# Altium PCB TIDA-010954-RevB.PcbDoc (part 2 of 8)
Units mm, origin at the board's own origin, x right, y up, seen from the top; angles counter-clockwise.
Board outline 290 x 100 mm, 6 copper layers (Top Layer, Mid1, Mid2, Mid3, Mid4, Bottom Layer), stack 1.59 mm thick; 394 components, 204 nets, 1137 pads, 2188 vias.
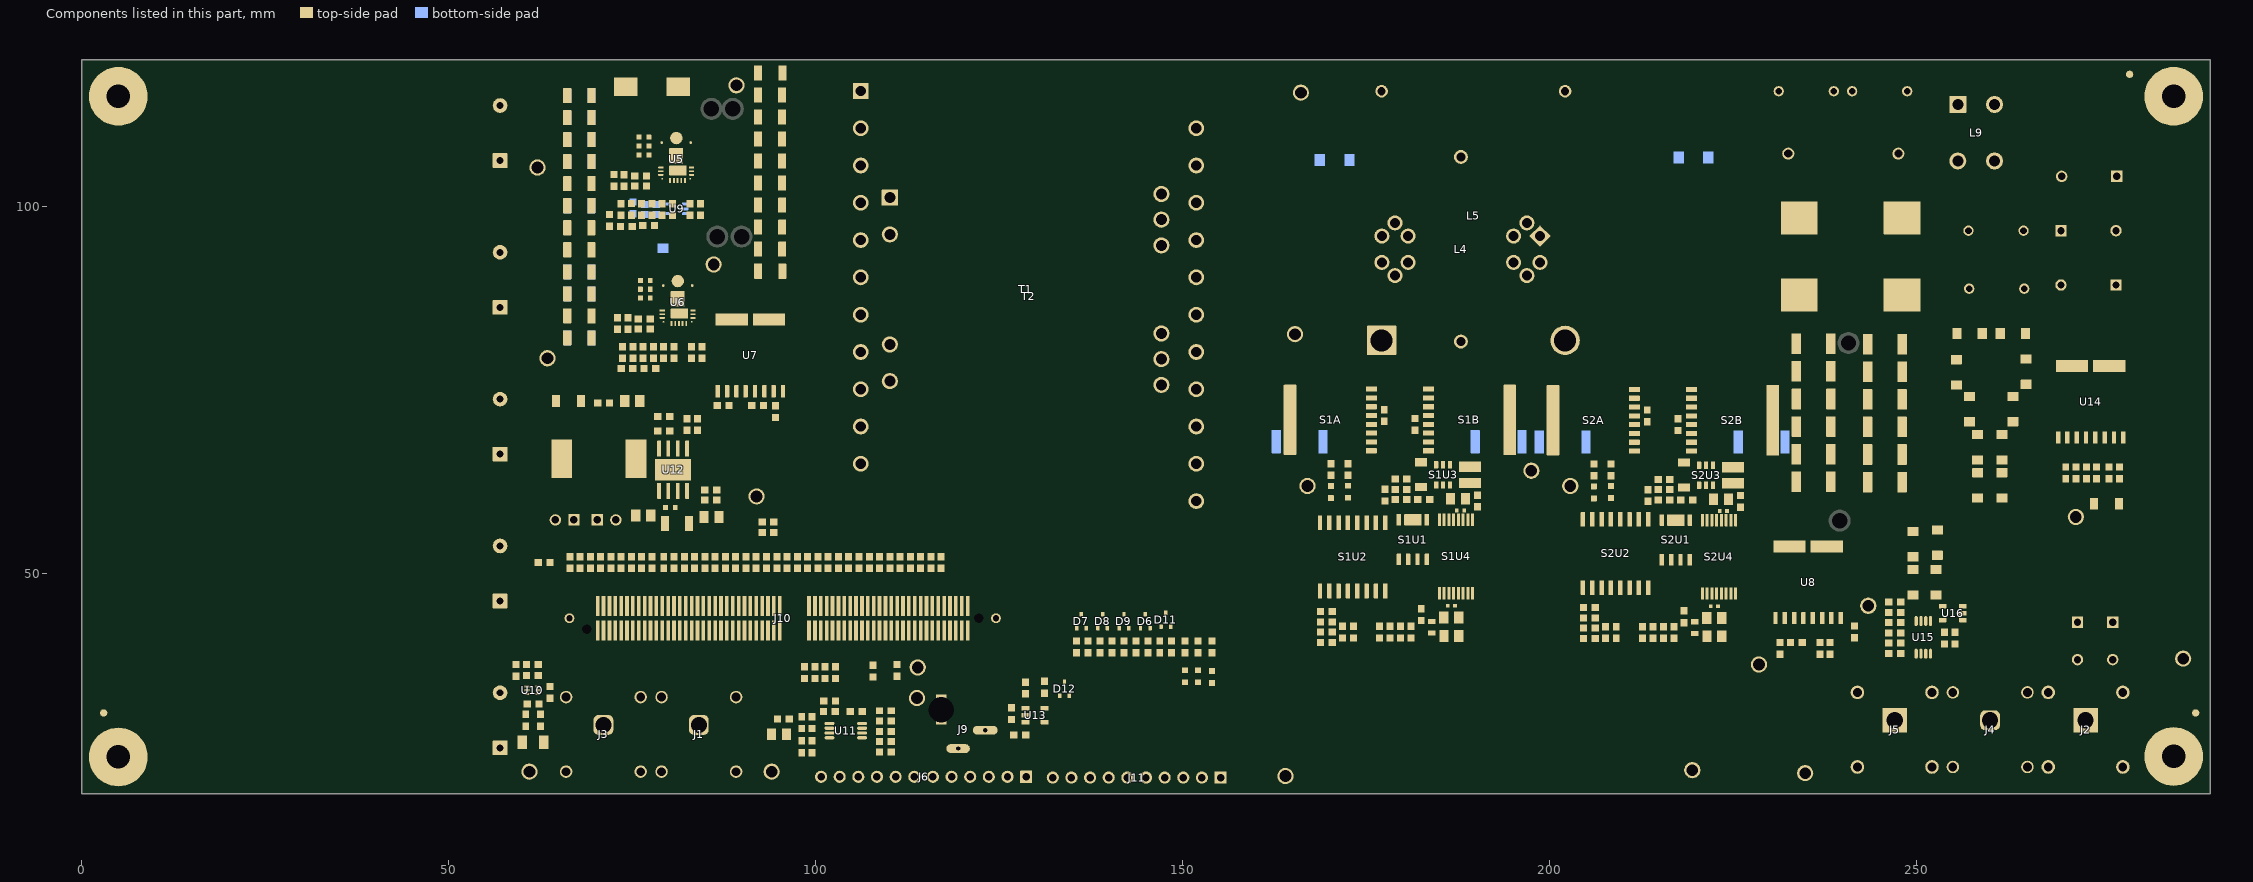
[diagram p6: the components of this part, seen from the top]

## Components (designator, comment, footprint, x,y, rotation, side; value= is the part's Value field where it differs from the comment) (continued)
ZZ2 "These assemblies are ESD sensitive, ESD precautions shall be observed." AssemblyNote 2.949,151.009 r0 top
ZZ3 "These assemblies must be clean and free from flux and all contaminants. Use of no clean flux is not acceptable." AssemblyNote 2.949,148.76 r0 top
ZZ4 "These assemblies must comply with workmanship standards IPC-A-610 Class 2, unless otherwise specified." AssemblyNote 2.949,146.511 r0 top

## Footprints (in the part's own frame and the unit in brackets; to place one, negate y for a bottom-side part, rotate by r counter-clockwise, add the part's x,y. Pads: shape width x height; smd on the part's side, far side on the other; paste and mask are expansions set on the pad)
0603 [mm] "0603 from SM-752 data"
  rect 1x0.95 smd: 1(-0.8,0) 2(0.8,0)
  silkscreen extent -1.52,-0.69 1.52,0.69, body extent -0.87,-0.47 0.87,0.47, height 1
0805_HV [mil] "0805 with 30mil clearance between pads"
  rect 50x63 smd: 1(-40,0) 2(40,0)
  silkscreen extent -74,-40 74,40, body extent -43,-29 43,29, height 57
1206 [mm] "1206 from SM-752 data"
  rect 1.3x1.85 smd: 1(-1.45,0) 2(1.45,0)
  silkscreen extent -2.4,-1.21 2.4,1.21, body extent -1.7,-0.9 1.7,0.9, height 1.35
1206_180 [mm] "1206_180"
  rect 1.1x1.6 smd: 1(-1.7,0) 2(1.7,0)
  silkscreen extent -0.9,-1 0.9,1, body extent -1.75,-0.95 1.75,0.95, height 1.8
APT1608_Green [mm] "SMD, 2-Leads, Body 0.8x1.6mm"
  rect 0.8x0.8 smd: 1(-0.825,0) 2(0.825,0)
  silkscreen extent -1,-0.7 1.8,0.7, body extent -0.8,-0.4 0.81,0.4, height 0.76
APT1608_Yellow [mm] "SMD, 2-Leads, Body 0.8x1.6mm"
  rect 0.8x0.8 smd: 1(-0.825,0) 2(0.825,0)
  silkscreen extent -1,-0.7 1.8,0.7, body extent -0.8,-0.4 0.81,0.4, height 0.76
AssemblyNote [mm] "Assembly Note"
AssemblyNoteLabel [mm] "Assembly Note for PCB Labels"
CE_Mark_5mm [mm] "Minimum text height for CE Mark"
  silkscreen extent -3.5,-2.5 3.5,2.5
Cliff_FCR7350B [mm] "Panel Socket, R/A, TH"
  rrect50% 2.7x2.7 hole 2.2: 1(0,0)
  round 1.7 hole 1.2: 2(-5.08,3.8) 3(5.08,3.8) 4(5.08,-6.36) 5(-5.08,-6.36)
  silkscreen extent -6.01,-13.5 6.01,5.5, body extent -6,-27.5 6,5.5, height 12.3
Cliff_FCR7350R [mm] "Panel Socket, R/A, TH"
  rrect50% 2.7x2.7 hole 2.2: 1(0,0)
  round 1.7 hole 1.2: 2(-5.08,3.8) 3(5.08,3.8) 4(5.08,-6.36) 5(-5.08,-6.36)
  silkscreen extent -6.01,-13.5 6.01,5.5, body extent -6,-27.5 6,5.5, height 12.3
controlCARD-120HSEC [mm] "Pads are not numbered according to Samtec datasheet."
  rect 0.5x2.724 smd: 1(-23.357,-1.678) 2(-23.357,1.722) 3(-22.557,-1.678) 4(-22.557,1.722) 5(-21.757,-1.678) 6(-21.757,1.722) 7(-20.957,-1.678) 8(-20.957,1.722) 9(-20.157,-1.678) 10(-20.157,1.722) 11(-19.357,-1.678) 12(-19.357,1.722) 13(-18.557,-1.678) 14(-18.557,1.722) 15(-17.757,-1.678) 16(-17.757,1.722) 17(-16.957,-1.678) 18(-16.957,1.722) 19(-16.157,-1.678) 20(-16.157,1.722) 21(-15.357,-1.678) 22(-15.357,1.722) 23(-14.557,-1.678) 24(-14.557,1.722) 25(-13.757,-1.678) 26(-13.757,1.722) 27(-12.957,-1.678) 28(-12.957,1.722) 29(-12.157,-1.678) 30(-12.157,1.722) 31(-11.357,-1.678) 32(-11.357,1.722) 33(-10.557,-1.678) 34(-10.557,1.722) 35(-9.757,-1.678) 36(-9.757,1.722) 37(-8.957,-1.678) 38(-8.957,1.722) 39(-8.157,-1.678) 40(-8.157,1.722) 41(-7.357,-1.678) 42(-7.357,1.722) 43(-6.557,-1.678) 44(-6.557,1.722) 45(-5.757,-1.678) 46(-5.757,1.722) 47(-4.957,-1.678) 48(-4.957,1.722) 49(-4.157,-1.678) 50(-4.157,1.722) 51(-3.357,-1.678) 52(-3.357,1.722) 53(-2.557,-1.678) 54(-2.557,1.722) 55(-1.757,-1.678) 56(-1.757,1.722) 57(2.243,-1.678) 58(2.243,1.722) 59(3.043,-1.678) 60(3.043,1.722) 61(3.843,-1.678) 62(3.843,1.722) 63(4.643,-1.678) 64(4.643,1.722) 65(5.443,-1.678) 66(5.443,1.722) 67(6.243,-1.678) 68(6.243,1.722) 69(7.043,-1.678) 70(7.043,1.722) 71(7.843,-1.678) 72(7.843,1.722) 73(8.643,-1.678) 74(8.643,1.722) 75(9.443,-1.678) 76(9.443,1.722) 77(10.243,-1.678) 78(10.243,1.722) 79(11.043,-1.678) 80(11.043,1.722) 81(11.843,-1.678) 82(11.843,1.722) 83(12.643,-1.678) 84(12.643,1.722) 85(13.443,-1.678) 86(13.443,1.722) 87(14.243,-1.678) 88(14.243,1.722) 89(15.043,-1.678) 90(15.043,1.722) 91(15.843,-1.678) 92(15.843,1.722) 93(16.643,-1.678) 94(16.643,1.722) 95(17.443,-1.678) 96(17.443,1.722) 97(18.243,-1.678) 98(18.243,1.722) 99(19.043,-1.678) 100(19.043,1.722) 101(19.843,-1.678) 102(19.843,1.722) 103(20.643,-1.678) 104(20.643,1.722) 105(21.443,-1.678) 106(21.443,1.722) 107(22.243,-1.678) 108(22.243,1.722) 109(23.043,-1.678) 110(23.043,1.722) 111(23.843,-1.678) 112(23.843,1.722) 113(24.643,-1.678) 114(24.643,1.722) 115(25.443,-1.678) 116(25.443,1.722) 117(26.243,-1.678) 118(26.243,1.722) 119(27.043,-1.678) 120(27.043,1.722)
  round 0.025 hole 1.27 unplated mask+0.876: 181(-24.857,0.022) 182(28.543,1.522)
  round 1.348 hole 0.84: 185(-27.207,0.022) 186(30.893,0.022)
  silkscreen extent -32.11,-3.86 35.8,3.9, body extent -31.75,-3.48 35.3,3.52, height 12.35
DBV0005A-MFG [mm]
  rrect17% 1.1x0.6 smd paste+0 mask+0: 1(-1.3,0.95) 2(-1.3,0) 3(-1.3,-0.95) 4(1.3,-0.95) 5(1.3,0.95)
  silkscreen extent -2.22,-1.53 0.87,1.72, body extent -1.95,-1.78 1.95,1.78, height 0.25
DBV0005A_N [mm] "SOT23, 5-Leads, Body 2.9x1.6mm, Pitch 0.95mm, Lead Span 2.8mm, IPC Medium Density"
  rrect17% 1x0.6 smd: 1(-1.375,0.95) 2(-1.375,0) 3(-1.375,-0.95) 4(1.375,-0.95) 5(1.375,0.95)
  silkscreen extent -1.62,-1.55 0.38,1.55, body extent -1.42,-1.46 1.42,1.46, height 1.09
DBV0006A_N [mm] "SOT23, 6-Leads, Body 2.9x1.6mm, Pitch 0.95mm, Lead Span 2.8mm, IPC Medium Density"
  rrect17% 1x0.6 smd: 1(-1.375,0.95) 2(-1.375,0) 3(-1.375,-0.95) 4(1.375,-0.95) 5(1.375,0) 6(1.375,0.95)
  silkscreen extent -1.68,-1.55 0.5,1.55, body extent -1.42,-1.46 1.42,1.46, height 1.12
DCK0005A_N [mm] "SOT353, 5-Leads, Body 2x1.3mm, Pitch 0.65mm, Lead Span 2.1mm, IPC Medium Density"
  rrect25% 0.85x0.4 smd: 1(-1.125,0.65) 2(-1.125,0) 3(-1.125,-0.65) 4(1.125,-0.65) 5(1.125,0.65)
  silkscreen extent -1.48,-1.02 0.55,1.1, body extent -1.14,-1 1.14,1, height 0.95
DDA0008E-MFG [mm]
  rrect20% 2.2x0.5 smd paste-1000 mask+0: 1(-2.875,1.905) 2(-2.875,0.635) 3(-2.875,-0.635) 4(-2.875,-1.905) 5(2.875,-1.905) 6(2.875,-0.635) 7(2.875,0.635) 8(2.875,1.905)
  rrect3% 2.95x4.9 smd paste-1000 mask-1000: 9(0,0)
  silkscreen extent -4.67,-2.83 2,2.83, body extent -4.08,-2.68 4.08,2.68, height 0.25
DFQ0007A-MFG [mm]
  rrect17% 1.55x0.6 smd paste+0 mask+0: 1(-2.7,1.905) 2(-2.7,0.635) 3(-2.7,-0.635) 4(-2.7,-1.905) 5(2.7,-1.905) 7(2.7,1.905)
  rrect6% 1.55x2.36 smd paste+0 mask+0: 6(2.7,0)
  silkscreen extent -4.14,-2.5 1.55,2.5, body extent -3.57,-2.75 3.57,2.75, height 0.25
DGK0008A_N [mm] "TSOP, 8-Leads, Body 3x3mm, Pitch 0.65mm, IPC Medium Density"
  oval 1.35x0.45 smd: 1(-2.225,0.975) 2(-2.225,0.325) 3(-2.225,-0.325) 4(-2.225,-0.975) 5(2.225,-0.975) 6(2.225,-0.325) 7(2.225,0.325) 8(2.225,0.975)
  silkscreen extent -2.75,-1.55 0.95,1.55, body extent -2.45,-1.5 2.45,1.5, height 0.96
DRL0006A [mm] "SOTFL, 6-Flat Leads, Body 1.2x1.6x0.6mm, Pitch 0.5mm, TI recommended"
  rrect33% 0.67x0.3 smd: 1(-0.74,0.5) 2(-0.74,0) 3(-0.74,-0.5) 4(0.74,-0.5) 5(0.74,0) 6(0.74,0.5)
  silkscreen extent -0.9,-0.95 0.5,0.95, body extent -0.8,-0.8 0.8,0.8, height 0.61
DVG0010A-MFG [mm]
  rrect6% 1.65x4.41 smd paste+0 mask+0: 1(-4.875,2.54) 2(-4.875,-2.54)
  rrect17% 1.65x0.6 smd paste+0 mask+0: 3(4.875,-4.445) 4(4.875,-3.175) 5(4.875,-1.905) 6(4.875,-0.635) 7(4.875,0.635) 8(4.875,1.905) 9(4.875,3.175) 10(4.875,4.445)
  silkscreen extent -6.37,-5.25 3.67,5.25, body extent -5.8,-5.5 5.8,5.5, height 0.25
DW0016A-MFG [mm]
  rrect17% 2x0.6 smd paste+0 mask+0: 1(-4.65,4.445) 2(-4.65,3.175) 3(-4.65,1.905) 4(-4.65,0.635) 5(-4.65,-0.635) 6(-4.65,-1.905) 7(-4.65,-3.175) 8(-4.65,-4.445) 9(4.65,-4.445) 10(4.65,-3.175) 11(4.65,-1.905) 12(4.65,-0.635) 13(4.65,0.635) 14(4.65,1.905) 15(4.65,3.175) 16(4.65,4.445)
  silkscreen extent -5.46,-5.25 3.15,5.38, body extent -5.75,-5.35 5.75,5.35, height 0.25
DWX0016A-MFG [mm]
  rrect24% 1.7x0.41 smd paste+0 mask+0: 1(-5,2.275) 2(-5,1.625) 3(-5,0.975) 4(-5,0.325) 5(-5,-0.325) 6(-5,-0.975) 7(-5,-1.625) 8(-5,-2.275) 9(5,-2.275) 10(5,-1.625) 11(5,-0.975) 12(5,-0.325) 13(5,0.325) 14(5,0.975) 15(5,1.625) 16(5,2.275)
  silkscreen extent -6.52,-2.98 3.8,2.98, body extent -5.95,-3.22 5.95,3.22, height 0.25
E_900x700x900 [mm] "TH, 2- Leads, Body 9x7mm, Pin Spacing 7.5mm"
  round 1.4 hole 0.9: 1(-3.75,0) 2(3.75,0)
  silkscreen extent -4.5,-3.5 4.5,3.5, body extent -4.49,-3.5 4.49,3.5, height 11.96
FCC_disclaimer [mm]
Fiducial10-20 [mm]
  round 1 smd mask+0.5: 1(0,0)
  Top Layer keep-out circle w1.178: c0,0 r0.5
FP-63ZLJ2700M18X40_RADIAL-MFG [mm]
  rrect7% 2x2 hole 0.95 paste-2539.97 mask+0: 1(-3.75,0)
  round 2 hole 0.95 paste-2539.97 mask+0: 2(3.75,0)
  body extent -9,0 8.98,46, height 18
FP-750371975r00_PTH_XFRMR_62MM7_62MM8-MFG [mm]
  rrect5% 2.15x2.15 hole 1.4: 1(-22.86,27.94)
  round 2.15 hole 1.4: 2(-22.86,22.86) 3(-22.86,17.78) 4(-22.86,12.7) 5(-22.86,7.62) 6(-22.86,2.54) 7(-22.86,-2.54) 8(-22.86,-7.62) 9(-22.86,-12.7) 10(-22.86,-17.78) 11(-22.86,-22.86) 12(22.86,-27.94) 13(22.86,-22.86) 14(22.86,-17.78) 15(22.86,-12.7) 16(22.86,-7.62) 17(22.86,-2.54) 18(22.86,2.54) 19(22.86,7.62) 20(22.86,12.7) 21(22.86,17.78) 22(22.86,22.86)
  silkscreen extent -32.07,-31.4 31.35,31.4, body extent -31.45,-31.5 31.45,31.5, height 0.25
FP-750371976r00_XFRMR_22MM0_22MM0-MFG [mm]
  rrect5% 2.05x2.05 hole 1.35 paste-2539.97 mask+0: 1(-8.89,6.35)
  round 2.05 hole 1.35 paste-2539.97 mask+0: 2(-8.89,3.81) 3(-6.35,3.81) 4(3.81,-6.35) 5(3.81,-8.89) 6(6.35,-8.89) 7(8.89,-6.35) 8(8.89,-3.81) 9(6.35,-3.81) 10(-3.81,6.35) 11(-3.81,8.89) 12(-6.35,8.89)
  round 1.9 hole 1.25 paste-2539.97 mask+0: 13(8.89,8.89) 14(-8.89,-8.89)
  silkscreen extent -11.72,-11 11,11, body extent -11.1,-11.1 11.1,11.1, height 0.25
FP-7443551221_SMD_IND_12MM8_12MM8-MFG [mm]
  rrect2% 5x4.5 smd paste+0 mask+0: 1(0,5.25) 2(0,-5.25)
  silkscreen extent -6.65,-6.65 6.65,6.65, body extent -6.75,-7.6 6.75,7.6, height 0.25
FP-7448025003_PTH_COMMON_CHOKE-MFG [mm]
  rrect4% 2.3x2.3 hole 1.5 paste-2539.97 mask+0: 1(-3.85,-2.5)
  round 2.3 hole 1.5 paste-2539.97 mask+0: 2(3.85,-2.5) 3(3.85,2.5) 4(-3.85,2.5)
  silkscreen extent -9,-7 9,7, body extent -9.1,-7.1 9.1,7.1, height 0.25
FP-36916300000_RADIAL-MFG [mm]
  rrect6% 1.55x1.55 hole 1 paste-2539.97 mask+0: 1(-2.54,0)
  round 1.55 hole 1 paste-2539.97 mask+0: 2(2.54,0)
  silkscreen extent -4.25,-2 4.25,2, body extent -4.35,-2.1 4.35,2.1, height 0.25
FP-694106402002_CONN_PWR_10MM7_9MM0-MFG [mm]
  rrect7% 1.4x4.1 hole 3.5 slot 0.8 at 0 deg paste-2539.97 mask+0: 1(-3.5,1.15)
  rrect100% 3.2x1.2 hole 0.6 slot 2.6 at 0 deg paste-2539.97 mask+0: 2(-1.2,-4.15)
  rrect100% 3.4x1.2 hole 0.6 slot 2.8 at 0 deg paste-2539.97 mask+0: 3(2.5,-1.65)
  silkscreen extent -4.75,-5.5 4.75,5.5, body extent -4.85,-5.6 4.85,5.6, height 0.25
FP-APG1608SURKC_T_0603-MFG [mm]
  rrect13% 0.8x0.8 smd paste-1000 mask+0: 1(-0.825,0) 2(0.825,0)
  silkscreen extent -1.92,-0.8 0.85,0.8, body extent -1.33,-0.55 1.33,0.55, height 0.25
FP-B181125V0_PTH_IND_41MM45_35MM1-MFG [mm]
  rrect4% 4x4 hole 3 paste-2539.97 mask+0: 1(-16.975,12.5)
  round 4 hole 3 paste-2539.97 mask+0: 2(-16.975,-12.5)
  round 1.7 hole 1.1 paste-2539.97 mask+0: 3(16.975,12.5) 4(16.975,-12.5)
  silkscreen extent -21.45,-17.55 20.73,17.55, body extent -20.83,-17.65 20.83,17.65, height 0.25
FP-B181134V1_PTH_XFRMR_48MM0_50MM0-MFG [mm]
  rrect5% 2.2x2.2 hole 1.5 paste-2539.97 mask+0: 1(-12.5,-18.5)
  round 2.2 hole 1.5 paste-2539.97 mask+0: 2(-7.5,-18.5) 3(7.5,-18.5) 4(12.5,-18.5) 5(13,18.5) 6(9.5,18.5) 7(6,18.5) 8(-6,18.5) 9(-9.5,18.5) 10(-13,18.5)
  silkscreen extent -25,-24.62 25.4,25.1, body extent -26,-25 26,25, height 0.25
FP-C4532X7T2E105K250KA_1812-MFG [mm]
  rrect8% 1.3x2.8 smd paste+0 mask+0: 1(-2.35,0) 2(2.35,0)
  silkscreen extent -2.45,-1.8 2.45,1.8, body extent -3.1,-1.9 3.1,1.9, height 0.25
FP-ERJP08D4993V_1206-MFG [mm]
  rrect8% 1.25x1.5 smd paste+0 mask+0: 1(-1.725,0) 2(1.725,0)
  silkscreen extent -0.72,-0.82 0.72,0.82, body extent -2.45,-0.92 2.45,0.92, height 0.25
FP-FCR7350G_CONN_BANANA_JACK-MFG [mm]
  rrect3% 3.35x3.35 hole 2.2 paste-2539.97 mask+0: 1(11,0)
  round 1.85 hole 1.2 paste-2539.97 mask+0: 2(4.64,5.08) 3(14.8,5.08) 4(4.64,-5.08) 5(14.8,-5.08)
  silkscreen extent -1.83,-6.05 17.2,6.05, body extent -16.7,-6.15 16.7,6.15, height 0.25
FP-FCR7350L_CONN_BANANA_JACK-MFG [mm]
  rrect3% 3.35x3.35 hole 2.2 paste-2539.97 mask+0: 1(11,0)
  round 1.85 hole 1.2 paste-2539.97 mask+0: 2(4.64,5.08) 3(14.8,5.08) 4(4.64,-5.08) 5(14.8,-5.08)
  silkscreen extent -1.83,-6.05 17.2,6.05, body extent -16.7,-6.15 16.7,6.15, height 0.25
FP-GRM32EC72A106KE05L_1210-MFG [mm]
  rrect9% 1.1x2.05 smd paste+0 mask+0: 1(-1.65,0) 2(1.65,0)
  silkscreen extent -0.72,-1.35 0.72,1.35, body extent -2.3,-1.45 2.3,1.45, height 0.25
FP-GRM188R72A104KA35J_0603-MFG [mm]
  rrect15% 0.65x0.7 smd paste+0 mask+0: 1(-0.675,0) 2(0.675,0)
  body extent -1.1,-0.55 1.1,0.55, height 0.25
FP-IsoM3-275-B-L2_RADIAL-MFG [mm]
  rrect6% 1.55x1.55 hole 1 paste-2539.97 mask+0: 1(-3.75,0)
  round 1.55 hole 1 paste-2539.97 mask+0: 2(3.75,0)
  silkscreen extent -6.6,-3.45 6.6,3.45, body extent -6.7,-3.55 6.7,3.55, height 0.25
FP-THJP2512AST1_2512-MFG [mil]
  rrect8% 49x125 smd paste+0 mask+0: 1(-125.5,0) 2(125.5,0)
  silkscreen extent -86,-66 86,66, body extent -126,-63 126,63, height 35
IEC_HighVoltage_Small [mm]
  silkscreen extent -2.72,-2.24 2.72,2.47
IEC_HotSurface_Small [mm]
  silkscreen extent -2.72,-2.36 2.72,2.35
Keystone5010 [mil] "Keystone Multipurpose loops"
  round 87 hole 63: 1(0,0)
  silkscreen extent -70,-70 70,70, body extent -63,-63 63,62, height 319
Keystone5011 [mil] "Keystone Multipurpose loops"
  round 87 hole 63: 1(0,0)
  silkscreen extent -70,-70 70,70, body extent -63,-63 63,62, height 319
Keystone5127 [mil] "Keystone Multipurpose loops"
  round 87 hole 63: 1(0,0)
  silkscreen extent -70,-70 70,70, body extent -63,-63 63,62, height 319
Keystone_1902C [mil] "Hex Standoff, 4-40 threaded, nylon"
  round 1 on Mech4: 0(0,0)
  body extent -145,-126 146,126, height 501
KLA0009A-MFG [mm]
  rrect14% 1.5x0.7 smd paste+0 mask-1000: 1(-5.539,4.2) 2(-5.539,3) 3(-5.539,1.8) 4(-5.539,0.6) 5(-5.539,-0.6) 6(-5.539,-1.8) 7(-5.539,-3) 8(-5.539,-4.2)
  rrect15% 1.75x9.6 smd paste-1000 mask-1000: 9(5.539,0)
  Top Layer region: -6.36,4.6 -6.351,4.635 -6.325,4.661 -6.29,4.67 -6.29,4.67 1.587,4.67 1.622,4.661 1.648,4.635 1.657,4.6 1.657,4.6 1.657,-4.6 1.648,-4.635 1.622,-4.661 1.587,-4.67 1.587,-4.67 -3.388,-4.67 -3.423,-4.661 -3.449,-4.635 -3.458,-4.6 -3.458,-4.6 -3.458,0.13 -3.462,0.149 -3.473,0.165 -3.489,0.176 -3.508,0.18 -3.508,0.18 -6.29,0.18 -6.317,0.185 -6.339,0.201 -6.355,0.223 -6.36,0.25 -6.36,0.25
  silkscreen extent -6.96,-5.18 5.24,5.18, body extent -6.46,-5.1 6.56,5.1, height 0.25
Label_650x200 [mil] "Thermal Transfer Label"
  round 1 on Mech13: 0(0,0)
  silkscreen extent -325,-100 325,100, body extent -325,-100 325,100, height 1
Molex_0022284023 [mm] "Header, 2.54mm, 2x1, TH"
  rect 1.55x1.55 hole 1.02: 1(-1.27,0)
  round 1.55 hole 1.02: 2(1.27,0)
  silkscreen extent -2.54,-1.24 2.54,1.5, body extent -2.54,-1.24 2.54,1.24, height 8.4
Net-Tie_50milWide_30milLong [mil] "50mil net tie, no solder mask opening, no solder paste"
  rect 30x50 smd paste-20 mask-20: 1(-15,0) 2(15,0)
"NY PMS 440 0025 PH" [mm] "4-40 nylon screw and mounting hole"
  round 8 hole 3.2: 1(0,0)
  body extent -3.3,-3.3 3.3,3.3, height 2.69
SDR0302 [mm] "BOURNS"
  rect 1.4x3 smd: 1(-1.1,0) 2(1.1,0)
  body extent -1.65,-1.65 1.65,1.65, height 2.8
SMA_Bi [mm] "SMD, 2-Leads, Body 4.275x2.575mm"
  rect 1.4x1.64 smd: 1(-2.015,0) 2(2.015,0)
  silkscreen extent -2.3,-1.45 2.3,1.45, body extent -2.52,-1.45 2.52,1.45, height 2.65
SOT-323 [mm] "Diodes Inc recommended land pattern.  2016-02-24"
  rrect21% 0.6x0.47 smd: 1(-0.95,0.65) 2(-0.95,-0.65) 3(0.95,0)
  silkscreen extent -1.14,-1.22 0.77,1.22, body extent -1.13,-1.13 1.12,1.12, height 1.13
SRR1210 [mm] "Bourns UL"
  rect 2.8x5.3 smd: 1(-5.05,0) 2(5.05,0)
  silkscreen extent -6.3,-6.3 6.3,6.3, body extent -6.25,-6.25 6.25,6.25, height 10
TI_Stacked_Overlay_Small [mm]
  silkscreen extent -10.63,-2.49 10.63,2.49
TSW-110-07-G-S [mm] "Samtec 100mil, 1x10, 230 mil above insulator"
  rrect6% 1.65x1.65 hole 1.016: 1(-11.43,0)
  round 1.65 hole 1.016: 2(-8.89,0) 3(-6.35,0) 4(-3.81,0) 5(-1.27,0) 6(1.27,0) 7(3.81,0) 8(6.35,0) 9(8.89,0) 10(11.43,0)
  silkscreen extent -12.7,-1.27 12.7,1.65, body extent -12.7,-1.27 12.7,1.27, height 8.38
TSW-112-07-G-S [mm] "Samtec 100mil, 1x12, 230 mil above insulator"
  rrect6% 1.65x1.65 hole 1.016 mask+0: 1(-13.97,0)
  round 1.65 hole 1.016 mask+0: 2(-11.43,0) 3(-8.89,0) 4(-6.35,0) 5(-3.81,0) 6(-1.27,0) 7(1.27,0) 8(3.81,0) 9(6.35,0) 10(8.89,0) 11(11.43,0) 12(13.97,0)
  silkscreen extent -15.24,-1.27 15.24,1.65, body extent -15.24,-1.27 15.24,1.27, height 8.38
VBN0018A-MFG [mm]
  round 0.228 smd paste+0 mask+0: 1(-1.925,3.125) 11(1.925,3.125)
  rrect40% 0.7x0.25 smd paste+0 mask+0: 2(-2.1,2.575) 3(-2.1,2.075) 4(-2.1,1.575) 8(2.1,1.575) 9(2.1,2.075) 10(2.1,2.575)
  round 0.376 smd paste+0 mask+0: 5(-1.969,-1.819) 7(1.969,-1.819)
  round 1.691 smd paste-1000 mask+0: 6(-0.01,-2.435)
  rrect40% 0.25x0.7 smd paste+0 mask+0: 12(0.825,3.35) 13(0.325,3.35) 14(-0.175,3.35) 15(-0.675,3.35) 16(-1.175,3.35)
  rrect8% 2.35x1.33 smd paste-1000 mask+0: 17(-0.225,1.985)
  rrect5% 1.9x2.076 smd paste-1000 mask+0: 18(0,-0.018)
  Top Layer region: -1.45,2.6 -1.437,2.65 -1.4,2.687 -1.35,2.7 -1.35,2.7 0.9,2.7 0.938,2.692 0.971,2.671 0.992,2.638 1,2.6 1,2.6 1,-3.65 0.987,-3.7 0.95,-3.737 0.9,-3.75 0.9,-3.75 -0.9,-3.75 -0.95,-3.737 -0.987,-3.7 -1,-3.65 -1,-3.65 -1,1.17 -1.013,1.22 -1.05,1.257 -1.1,1.27 -1.1,1.27 -1.35,1.27 -1.388,1.278 -1.421,1.299 -1.442,1.332 -1.45,1.37 -1.45,1.37
  Top Layer region: -0.55,-3.65 -0.554,-3.669 -0.565,-3.685 -0.581,-3.696 -0.6,-3.7 -0.6,-3.7 -0.75,-3.7 -0.775,-3.693 -0.793,-3.675 -0.8,-3.65 -0.8,-3.65 -0.8,-3.425 -0.804,-3.406 -0.815,-3.39 -0.831,-3.379 -0.85,-3.375 -0.85,-3.375 -0.9,-3.375 -0.925,-3.368 -0.943,-3.35 -0.95,-3.325 -0.95,-3.325 -0.95,-1.406 -0.943,-1.381 -0.925,-1.363 -0.9,-1.356 -0.9,-1.356 0.9,-1.356 0.919,-1.36 0.935,-1.371 0.946,-1.387 0.95,-1.406 0.95,-1.406 0.95,-3.325 0.943,-3.35 0.925,-3.368 0.9,-3.375 0.9,-3.375 0.5,-3.375 0.481,-3.379 0.465,-3.39 0.454,-3.406 0.45,-3.425 0.45,-3.425 0.45,-3.65 0.443,-3.675 0.425,-3.693 0.4,-3.7 0.4,-3.7 0.25,-3.7 0.231,-3.696 0.215,-3.685 0.204,-3.669 0.2,-3.65 0.2,-3.65 0.2,-3.425 0.196,-3.406 0.185,-3.39 0.169,-3.379 0.15,-3.375 0.15,-3.375 0,-3.375 -0.019,-3.379 -0.035,-3.39 -0.046,-3.406 -0.05,-3.425 -0.05,-3.425 -0.05,-3.65 -0.054,-3.669 -0.065,-3.685 -0.081,-3.696 -0.1,-3.7 -0.1,-3.7 -0.25,-3.7 -0.275,-3.693 -0.293,-3.675 -0.3,-3.65 -0.3,-3.65 -0.3,-3.425 -0.304,-3.406 -0.315,-3.39 -0.331,-3.379 -0.35,-3.375 -0.35,-3.375 -0.5,-3.375 -0.519,-3.379 -0.535,-3.39 -0.546,-3.406 -0.55,-3.425 -0.55,-3.425
  Top Layer region: -2.4,2.95 -2.419,2.954 -2.435,2.965 -2.446,2.981 -2.45,3 -2.45,3 -2.45,3.15 -2.443,3.175 -2.425,3.193 -2.4,3.2 -2.4,3.2 -2.05,3.2 -2.031,3.204 -2.015,3.215 -2.004,3.231 -2,3.25 -2,3.25 -2,3.65 -1.993,3.675 -1.975,3.693 -1.95,3.7 -1.95,3.7 -1.8,3.7 -1.781,3.696 -1.765,3.685 -1.754,3.669 -1.75,3.65 -1.75,3.65 -1.75,3 -1.754,2.981 -1.765,2.965 -1.781,2.954 -1.8,2.95 -1.8,2.95
  Top Layer region: 2.4,2.95 2.419,2.954 2.435,2.965 2.446,2.981 2.45,3 2.45,3 2.45,3.15 2.446,3.169 2.435,3.185 2.419,3.196 2.4,3.2 2.4,3.2 2.05,3.2 2.025,3.207 2.007,3.225 2,3.25 2,3.25 2,3.65 1.996,3.669 1.985,3.685 1.969,3.696 1.95,3.7 1.95,3.7 1.8,3.7 1.781,3.696 1.765,3.685 1.754,3.669 1.75,3.65 1.75,3.65 1.75,3 1.754,2.981 1.765,2.965 1.781,2.954 1.8,2.95 1.8,2.95
  Top Layer region: -2.075,0.65 -2.1,0.643 -2.118,0.625 -2.125,0.6 -2.125,0.6 -2.125,0.338 -2.129,0.319 -2.14,0.303 -2.156,0.292 -2.175,0.288 -2.175,0.288 -2.4,0.288 -2.425,0.281 -2.443,0.263 -2.45,0.238 -2.45,0.238 -2.45,0.088 -2.443,0.063 -2.425,0.045 -2.4,0.038 -2.4,0.038 -2.175,0.038 -2.15,0.031 -2.132,0.013 -2.125,-0.012 -2.125,-0.012 -2.125,-0.162 -2.132,-0.187 -2.15,-0.205 -2.175,-0.212 -2.175,-0.212 -2.4,-0.212 -2.425,-0.219 -2.443,-0.237 -2.45,-0.262 -2.45,-0.262 -2.45,-0.412 -2.443,-0.437 -2.425,-0.455 -2.4,-0.462 -2.4,-0.462 -2.175,-0.462 -2.156,-0.466 -2.14,-0.477 -2.129,-0.493 -2.125,-0.512 -2.125,-0.512 -2.125,-0.662 -2.129,-0.681 -2.14,-0.697 -2.156,-0.708 -2.175,-0.712 -2.175,-0.712 -2.4,-0.712 -2.419,-0.716 -2.435,-0.727 -2.446,-0.743 -2.45,-0.762 -2.45,-0.762 -2.45,-0.912 -2.443,-0.937 -2.425,-0.955 -2.4,-0.962 -2.4,-0.962 -2.175,-0.962 -2.156,-0.966 -2.14,-0.977 -2.129,-0.993 -2.125,-1.012 -2.125,-1.012 -2.125,-1.162 -2.129,-1.181 -2.14,-1.197 -2.156,-1.208 -2.175,-1.212 -2.175,-1.212 -2.4,-1.212 -2.419,-1.216 -2.435,-1.227 -2.446,-1.243 -2.45,-1.262 -2.45,-1.262 -2.45,-1.412 -2.443,-1.437 -2.425,-1.455 -2.4,-1.462 -2.4,-1.462 -2.175,-1.462 -2.156,-1.466 -2.14,-1.477 -2.129,-1.493 -2.125,-1.512 -2.125,-1.512 -2.125,-1.662 -2.129,-1.681 -2.14,-1.697 -2.156,-1.708 -2.175,-1.712 -2.175,-1.712 -2.4,-1.712 -2.419,-1.716 -2.435,-1.727 -2.446,-1.743 -2.45,-1.762 -2.45,-1.762 -2.45,-1.912 -2.443,-1.937 -2.425,-1.955 -2.4,-1.962 -2.4,-1.962 -2.175,-1.962 -2.156,-1.966 -2.14,-1.977 -2.129,-1.993 -2.125,-2.012 -2.125,-2.012 -2.125,-2.162 -2.129,-2.181 -2.14,-2.197 -2.156,-2.208 -2.175,-2.212 -2.175,-2.212 -2.4,-2.212 -2.419,-2.216 -2.435,-2.227 -2.446,-2.243 -2.45,-2.262 -2.45,-2.262 -2.45,-2.412 -2.443,-2.437 -2.425,-2.455 -2.4,-2.462 -2.4,-2.462 -2.175,-2.462 -2.156,-2.466 -2.14,-2.477 -2.129,-2.493 -2.125,-2.512 -2.125,-2.512 -2.125,-2.662 -2.129,-2.681 -2.14,-2.697 -2.156,-2.708 -2.175,-2.712 -2.175,-2.712 -2.4,-2.712 -2.419,-2.716 -2.435,-2.727 -2.446,-2.743 -2.45,-2.762 -2.45,-2.762 -2.45,-2.912 -2.443,-2.937 -2.425,-2.955 -2.4,-2.962 -2.4,-2.962 -2.175,-2.962 -2.156,-2.966 -2.14,-2.977 -2.129,-2.993 -2.125,-3.012 -2.125,-3.012 -2.125,-3.3 -2.118,-3.325 -2.1,-3.343 -2.075,-3.35 -2.075,-3.35 -1.8,-3.35 -1.781,-3.346 -1.765,-3.335 -1.754,-3.319 -1.75,-3.3 -1.75,-3.3 -1.75,0.6 -1.754,0.619 -1.765,0.635 -1.781,0.646 -1.8,0.65 -1.8,0.65
  Top Layer region: 2.075,0.65 2.094,0.646 2.11,0.635 2.121,0.619 2.125,0.6 2.125,0.6 2.125,0.338 2.129,0.319 2.14,0.303 2.156,0.292 2.175,0.288 2.175,0.288 2.4,0.288 2.419,0.284 2.435,0.273 2.446,0.257 2.45,0.238 2.45,0.238 2.45,0.088 2.443,0.063 2.425,0.045 2.4,0.038 2.4,0.038 2.175,0.038 2.156,0.034 2.14,0.023 2.129,0.007 2.125,-0.012 2.125,-0.012 2.125,-0.162 2.132,-0.187 2.15,-0.205 2.175,-0.212 2.175,-0.212 2.4,-0.212 2.425,-0.219 2.443,-0.237 2.45,-0.262 2.45,-0.262 2.45,-0.412 2.443,-0.437 2.425,-0.455 2.4,-0.462 2.4,-0.462 2.175,-0.462 2.156,-0.466 2.14,-0.477 2.129,-0.493 2.125,-0.512 2.125,-0.512 2.125,-0.662 2.129,-0.681 2.14,-0.697 2.156,-0.708 2.175,-0.712 2.175,-0.712 2.4,-0.712 2.419,-0.716 2.435,-0.727 2.446,-0.743 2.45,-0.762 2.45,-0.762 2.45,-0.912 2.443,-0.937 2.425,-0.955 2.4,-0.962 2.4,-0.962 2.175,-0.962 2.156,-0.966 2.14,-0.977 2.129,-0.993 2.125,-1.012 2.125,-1.012 2.125,-1.162 2.129,-1.181 2.14,-1.197 2.156,-1.208 2.175,-1.212 2.175,-1.212 2.4,-1.212 2.419,-1.216 2.435,-1.227 2.446,-1.243 2.45,-1.262 2.45,-1.262 2.45,-1.412 2.446,-1.431 2.435,-1.447 2.419,-1.458 2.4,-1.462 2.4,-1.462 2.175,-1.462 2.156,-1.466 2.14,-1.477 2.129,-1.493 2.125,-1.512 2.125,-1.512 2.125,-1.662 2.129,-1.681 2.14,-1.697 2.156,-1.708 2.175,-1.712 2.175,-1.712 2.4,-1.712 2.419,-1.716 2.435,-1.727 2.446,-1.743 2.45,-1.762 2.45,-1.762 2.45,-1.912 2.446,-1.931 2.435,-1.947 2.419,-1.958 2.4,-1.962 2.4,-1.962 2.175,-1.962 2.156,-1.966 2.14,-1.977 2.129,-1.993 2.125,-2.012 2.125,-2.012 2.125,-2.162 2.129,-2.181 2.14,-2.197 2.156,-2.208 2.175,-2.212 2.175,-2.212 2.4,-2.212 2.419,-2.216 2.435,-2.227 2.446,-2.243 2.45,-2.262 2.45,-2.262 2.45,-2.412 2.446,-2.431 2.435,-2.447 2.419,-2.458 2.4,-2.462 2.4,-2.462 2.175,-2.462 2.156,-2.466 2.14,-2.477 2.129,-2.493 2.125,-2.512 2.125,-2.512 2.125,-2.662 2.129,-2.681 2.14,-2.697 2.156,-2.708 2.175,-2.712 2.175,-2.712 2.4,-2.712 2.419,-2.716 2.435,-2.727 2.446,-2.743 2.45,-2.762 2.45,-2.762 2.45,-2.912 2.446,-2.931 2.435,-2.947 2.419,-2.958 2.4,-2.962 2.4,-2.962 2.175,-2.962 2.156,-2.966 2.14,-2.977 2.129,-2.993 2.125,-3.012 2.125,-3.012 2.125,-3.3 2.121,-3.319 2.11,-3.335 2.094,-3.346 2.075,-3.35 2.075,-3.35 1.8,-3.35 1.775,-3.343 1.757,-3.325 1.75,-3.3 1.75,-3.3 1.75,0.6 1.754,0.619 1.765,0.635 1.781,0.646 1.8,0.65 1.8,0.65
  silkscreen extent -3.13,-3.88 2.63,3.88, body extent -2.55,-3.8 2.55,3.8, height 0.25
WCAP-CSGP_0402_L1W0.5H0.5 [mm] "Ceramic Capacitors, body 1x0.5mm"
  rect 0.5x0.5 smd: 1(-0.5,0) 2(0.5,0)
  body extent -0.5,-0.25 0.5,0.25, height 0.5
WCAP-FTX2_L18W8.5H14.5_CS [mm] "Film Capacitors, 18x8.5x14.5mm"
  round 1.65 hole 1.1: 1(-7.5,0) 2(7.5,0)
  silkscreen extent -9.25,-4.5 9.25,4.5, body extent -9,-4.25 9,4.25, height 14.55
WE-HCM_1078_L9.4W6.2H7.8 [mm] "SMT High Current Flat Wire Inductor, 2-Leads, body 9.4x6.2mm"
  rect 3.2x2.54 smd: 1(-3.6,0) 2(3.6,0)
  silkscreen extent -4.85,-3.25 4.85,3.25, body extent -4.7,-3.1 4.7,3.1, height 7.8
WE-PMI_0603_L1.6W0.8H0.8 [mm] "Power Multilayer Inductor, body 1.6x0.8mm"
  rect 0.7x1 smd: 1(-0.8,0) 2(0.8,0)
  body extent -0.8,-0.4 0.8,0.4, height 0.8
WEEE_Minimum [mm] "WEEElie bin"
  silkscreen extent -2.42,-4.38 2.52,2.65

## Part data
C7 C18 C19 C22 C27 C28 C31 C45 C46 C69 C95 S1C2 S1C3 S1C4 S1C5 S1C9 S1C86 S2C2 S2C3 S2C4 S2C5 S2C9 S2C86: library part CMP-0007077-5, "CAP, CERM, 0.1 uF, 25 V, +/- 10%, X7R, AEC-Q200 Grade 1, 0603", Cap_Case=0603, Manufacturer=TDK, Supplier Part Number 1=445-5667-1-ND, TempCo=X7R, Tolerance_%=10%, Value1=Unknown, Value2=25V, ValueDisplayed=0.1uF, AEC Category=Q200, AEC Grade=1, AEC Qualified=Y, Cap_F=100nF, ComponentLink1Description="Datasheet link", ComponentLink1URL=https://product.tdk.com/info/en/documents/chara_sheet/CGA3E2X7R1E104K080AA.pdf, CompType=Capacitor, LatestRevisionDate=2017-03-09, MountType=SMT, PackageReference=0603, PartNumber=CGA3E2X7R1E104K080AA, Polarized=N, Published=2008-06-19, Publisher="Texas Instruments", RoHS=Y, SizeArea_mm2=1.28, SizeAreaWB_mm2=4.68, SizeX_mm=1.6, SizeY_mm=0.8, SizeZ_mm=1, Supplier 1=Digi-Key, Supplier 2=Newark, Supplier 3=Mouser, Supplier Part Number 2=79Y4100, Supplier Part Number 3=810-CGA3E2X7R1E104K, TaMax_C=125°C, TaMin_C=-55°C, Technology=Ceramic, U/M=EA, VDC_V=25V
C16 C17 C38 C39 C75 C87 C90 C92 C94 C97 C135 C137 S1C1 S2C1: library part CMP-0007206-4, "CAP, CERM, 300 pF, 50 V, +/- 5%, C0G/NP0, 0603", Cap_Case=0603, Manufacturer=MuRata, Supplier Part Number 1=490-1438-1-ND, TempCo=C0G/NP0, Tolerance_%=5%, Value1=Unknown, Value2=50V, ValueDisplayed=300pF, AEC Category=Q200, AEC Qualified=?, Cap_F=300pF, ComponentLink1Description="Datasheet link", ComponentLink1URL=http://search.murata.co.jp/Ceramy/PnsearchViewAction.do?HnOFG=ON&HnNFG=ON&SEL_CNT=50&sLang=en&sKey=GRM1885C1H301JA01D&x=9&y=9&search=startwith, CompType=Capacitor, LatestRevisionDate=2017-03-09, MountType=SMT, PackageReference=0603, PartNumber=GRM1885C1H301JA01D, Polarized=N, Published=2008-06-19, Publisher="Texas Instruments", RoHS=Y, SizeArea_mm2=1.28, SizeAreaWB_mm2=4.68, SizeX_mm=1.6, SizeY_mm=0.8, SizeZ_mm=1, Supplier 1=Digi-Key, Supplier 2=Mouser, Supplier Part Number 2=81-GRM185C1H301JA01D, TaMax_C=125°C, TaMin_C=-55°C, Technology=Ceramic, U/M=EA, VDC_V=50V
C20 C29 C103: library part CMP-0007157-5, "CAP, CERM, 1 uF, 16 V, +/- 10%, X5R, 0603", Cap_Case=0603, Manufacturer=MuRata, Supplier Part Number 1=490-3894-1-ND, TempCo=X5R, Tolerance_%=10%, Value1=Unknown, Value2=16V, ValueDisplayed=1uF, AEC Category=Q200, AEC Qualified=?, Cap_F=1µF, ComponentLink1Description="Datasheet link", ComponentLink1URL=http://search.murata.co.jp/Ceramy/PnsearchViewAction.do?HnOFG=ON&HnNFG=ON&SEL_CNT=50&sLang=en&sKey=GRM185R61C105KE44D&x=9&y=9&search=startwith, CompType=Capacitor, LatestRevisionDate=2017-03-09, MountType=SMT, PackageReference=0603, PartNumber=GRM185R61C105KE44D, Polarized=N, Published=2008-06-19, Publisher="Texas Instruments", RoHS=Y, SizeArea_mm2=1.28, SizeAreaWB_mm2=4.68, SizeX_mm=1.6, SizeY_mm=0.8, SizeZ_mm=1, Supplier 1=Digi-Key, Supplier 2=Mouser, Supplier 3=Farnell, Supplier Part Number 2=81-GRM185R61C105KE44, Supplier Part Number 3=1845733, TaMax_C=85°C, TaMin_C=-55°C, Technology=Ceramic, U/M=EA, VDC_V=16V
C21 C23 C30 C32 S1C6 S1C8 S2C6 S2C8: library part CMP-0007171-4, "CAP, CERM, 100 pF, 50 V, +/- 5%, C0G/NP0, 0603", Cap_Case=0603, Manufacturer=MuRata, Supplier Part Number 1=490-1427-1-ND, TempCo=C0G/NP0, Tolerance_%=5%, Value1=Unknown, Value2=50V, ValueDisplayed=100pF, AEC Category=Q200, AEC Qualified=?, Cap_F=100pF, ComponentLink1Description="Datasheet link", ComponentLink1URL=http://search.murata.co.jp/Ceramy/PnsearchViewAction.do?HnOFG=ON&HnNFG=ON&SEL_CNT=50&sLang=en&sKey=GRM1885C1H101JA01D&x=9&y=9&search=startwith, CompType=Capacitor, LatestRevisionDate=2017-03-09, MountType=SMT, PackageReference=0603, PartNumber=GRM1885C1H101JA01D, Polarized=N, Published=2008-06-19, Publisher="Texas Instruments", RoHS=Y, SizeArea_mm2=1.28, SizeAreaWB_mm2=4.68, SizeX_mm=1.6, SizeY_mm=0.8, SizeZ_mm=1, Supplier 1=Digi-Key, Supplier 2=Mouser, Supplier 3=Farnell, Supplier Part Number 2=81-GRM39C101J50, Supplier Part Number 3=8819866, TaMax_C=125°C, TaMin_C=-55°C, Technology=Ceramic, U/M=EA, VDC_V=50V
C24 C110 C111 C120 C121 C122 C123 C124 C125: library part CMP-0007196-4, "CAP, CERM, 22 pF, 50 V, +/- 5%, C0G/NP0, 0603", Cap_Case=0603, Manufacturer=MuRata, Supplier Part Number 1=490-1411-1-ND, TempCo=C0G/NP0, Tolerance_%=5%, Value1=Unknown, Value2=50V, ValueDisplayed=22pF, AEC Category=Q200, AEC Qualified=?, Cap_F=22pF, ComponentLink1Description="Datasheet link", ComponentLink1URL=http://search.murata.co.jp/Ceramy/PnsearchViewAction.do?HnOFG=ON&HnNFG=ON&SEL_CNT=50&sLang=en&sKey=GRM1885C1H220JA01D&x=9&y=9&search=startwith, CompType=Capacitor, LatestRevisionDate=2017-03-09, MountType=SMT, PackageReference=0603, PartNumber=GRM1885C1H220JA01D, Polarized=N, Published=2008-06-19, Publisher="Texas Instruments", RoHS=Y, SizeArea_mm2=1.28, SizeAreaWB_mm2=4.68, SizeX_mm=1.6, SizeY_mm=0.8, SizeZ_mm=1, Supplier 1=Digi-Key, Supplier 2=Mouser, Supplier 3=Farnell, Supplier Part Number 2=81-GRM39C220J50, Supplier Part Number 3=8819831, TaMax_C=125°C, TaMin_C=-55°C, Technology=Ceramic, U/M=EA, VDC_V=50V
C25 C26 C33 C34 C35 C36 C37 C40 C41 C42 C43 C44 C47 C48 C49 C50 C51 C52 C55 C56 C59 C60 C70 C71 C72 C74 C76 C77 C78 C79 C98: library part CMP-0087970-1, "10µF ±10% 100V Ceramic Capacitor X7S 1210 (3225 Metric)", Manufacturer=Murata, TempCo=22%, Tolerance_%=0.1, ValueDisplayed=10uF, AEC Qualified=No, Cap_F=10µF, ComponentLink1Description=Datasheet, ComponentLink1URL=https://search.murata.co.jp/Ceramy/image/img/A01X/G101/ENG/GRM32EC72A106KE05-01A.pdf, PackageReference=1210, PartNumber=GRM32EC72A106KE05L, RoHS=TRUE, SizeZ_mm=2.7mm, Symbol Name=SYM-GRM32EC72A106KE05L, VDC_V=100V
C53 C54 C57 C58 C61 C62 C63 C64 C65 C66 C67 C68: library part CMP-0091547-1, "Multilayer Ceramic Capacitors 1uF ±10% 250V X7T SMD 1812", Manufacturer=TDK, Operating Temperature Range="-55°C to +125°C", TempCo=+22/-33%, Temperature Characteristic=X7T, Tolerance_%=0.1%, ValueDisplayed=1uF, AEC Qualified=No, Cap_F=1µF, ComponentLink1Description=Datasheet, ComponentLink1URL=https://product.tdk.com/en/search/capacitor/ceramic/mlcc/info?part_no=C4532X7T2E105K250KA, datasheet=https://product.tdk.com/en/search/capacitor/ceramic/mlcc/info?part_no=C4532X7T2E105K250KA, Datasheet Path=datasheets/Cap-C4532X7T2E105K250KA.pdf, helpURL=https://upverter.com/upn/revision/c5b3fd182a76e9cb/, Lead Free=Yes, PackageReference=1812, Part Number=C4532X7T2E105K250KA, PartNumber=C4532X7T2E105K250KA, RoHS=TRUE, SizeZ_mm=2.8mm, VDC_V=250V
C73 C102: library part CMP-0008959-2, "CAP, CERM, 22 uF, 10 V, +/- 10%, X7R, 1206", Cap_Case=1206, Manufacturer=MuRata, Supplier Part Number 1=490-5309-1-ND, TempCo=X7R, Tolerance_%=10%, Value1=Unknown, Value2=10V, ValueDisplayed=22uF, AEC Category=Q200, AEC Qualified=?, Cap_F=22µF, ComponentLink1Description="Datasheet link", ComponentLink1URL=http://search.murata.co.jp/Ceramy/PnsearchViewAction.do?HnOFG=ON&HnNFG=ON&SEL_CNT=50&sLang=en&sKey=GRM31CR71A226KE15L&x=9&y=9&search=startwith, CompType=Capacitor, LatestRevisionDate=2017-03-09, MountType=SMT, PackageReference=1206, PartNumber=GRM31CR71A226KE15L, Polarized=N, Published=2008-06-19, Publisher="Texas Instruments", RoHS=Y, SizeArea_mm2=5.12, SizeAreaWB_mm2=10.92, SizeX_mm=3.2, SizeY_mm=1.6, SizeZ_mm=1.8, Supplier 1=Digi-Key, Supplier 2=Mouser, Supplier 3=Farnell, Supplier Part Number 2=81-GRM31CR71A226K15L, Supplier Part Number 3=1797016, TaMax_C=125°C, TaMin_C=-55°C, Technology=Ceramic, U/M=EA, VDC_V=10V
C81 C82 C83 C84 C85: library part CMP-0122849-1, "2700 µF 63 V Aluminum Electrolytic Capacitors Radial, Can 10000 Hrs @ 105°C", Digikey Part Number=1189-4111-ND, Leakage Current=1701uA, Manufacturer=Rubycon, Mouser Part Number=232-63ZLJ2700M18X40, Operating Temperature Range="-40°C to +105°C", Part Number=63PK3300MEFC18X40, Tolerance_%=20%, ValueDisplayed=3300uF, AEC Qualified=No, Cap_F=2.7mF, ComponentLink1Description=Datasheet, ComponentLink1URL=https://www.rubycon.co.jp/wp-content/uploads/catalog-aluminum/ZLJ.pdf, datasheet=https://www.rubycon.co.jp/wp-content/uploads/catalog-aluminum/ZLJ.pdf, Datasheet Path=datasheets/Cap-63ZLJ2700M18X40.pdf, Digikey Description="CAP ALUM 2700UF 20% 63V RADIAL", Dissipation Factor=9%, helpURL=https://upverter.com/upn/revision/aed06e7c5360b1c1/, IRMS_A=4.3A, Lead Free=Yes, Life=10000Hours, PackageReference=RADIAL, PartNumber=63ZLJ2700M18X40, RoHS=TRUE, SizeZ_mm=42mm, Supplier 1=Digikey, Supplier 2=Mouser, Supplier Part Number 1=1189-4111-ND, Supplier Part Number 2=232-63ZLJ2700M18X40, VDC_V=63V
C88 C96 C99 C101 C127 C138 C140: library part CMP-0122713-1, "Chip Multilayer Ceramic Capacitors for General Purpose, 0603, 0.10uF, X7R, 15%, 10%, 100V", Manufacturer=Murata, Operating Temperature Range="-55°C to +125°C", TempCo=15%, Temperature Characteristic=X7R, Tolerance_%=10%, ValueDisplayed=0.10uF, AEC Qualified=No, Cap_F=100nF, ComponentLink1Description=Datasheet, ComponentLink1URL=https://www.murata.com/en-us/products/productdetail?partno=GRM188R72A104KA35%23, datasheet=https://www.murata.com/en-us/products/productdetail?partno=GRM188R72A104KA35%23, Datasheet Path=datasheets/Cap-GRM188R72A104KA35J.pdf, helpURL=https://upverter.com/upn/revision/71520f38ae33ed89/, Lead Free=Yes, PackageReference=0603, Part Number=GRM188R72A104KA35J, PartNumber=GRM188R72A104KA35J, RoHS=TRUE, SizeZ_mm=0.9mm, VDC_V=100V
C89: library part CMP-0007198-4, "CAP, CERM, 2200 pF, 50 V, +/- 5%, C0G/NP0, 0603", Cap_Case=0603, Manufacturer=MuRata, Supplier Part Number 1=490-1459-1-ND, TempCo=C0G/NP0, Tolerance_%=5%, Value1=Unknown, Value2=50V, ValueDisplayed=2200pF, AEC Category=Q200, AEC Qualified=?, Cap_F=2.2nF, ComponentLink1Description="Datasheet link", ComponentLink1URL=http://search.murata.co.jp/Ceramy/PnsearchViewAction.do?HnOFG=ON&HnNFG=ON&SEL_CNT=50&sLang=en&sKey=GRM1885C1H222JA01D&x=9&y=9&search=startwith, CompType=Capacitor, LatestRevisionDate=2017-03-09, MountType=SMT, PackageReference=0603, PartNumber=GRM1885C1H222JA01D, Polarized=N, Published=2008-06-19, Publisher="Texas Instruments", RoHS=Y, SizeArea_mm2=1.28, SizeAreaWB_mm2=4.68, SizeX_mm=1.6, SizeY_mm=0.8, SizeZ_mm=1, Supplier 1=Digi-Key, Supplier 2=Mouser, Supplier 3=Farnell, Supplier Part Number 2=81-GRM1885C1H222JA01, Supplier Part Number 3=8819947, TaMax_C=125°C, TaMin_C=-55°C, Technology=Ceramic, U/M=EA, VDC_V=50V
C91 C93 C134 C136: library part CMP-0007225-4, "CAP, CERM, 560 pF, 50 V, +/- 5%, C0G/NP0, 0603", Cap_Case=0603, Manufacturer=MuRata, Supplier Part Number 1=490-1445-1-ND, TempCo=C0G/NP0, Tolerance_%=5%, Value1=Unknown, Value2=50V, ValueDisplayed=560pF, AEC Category=Q200, AEC Qualified=?, Cap_F=560pF, ComponentLink1Description="Datasheet link", ComponentLink1URL=http://search.murata.co.jp/Ceramy/PnsearchViewAction.do?HnOFG=ON&HnNFG=ON&SEL_CNT=50&sLang=en&sKey=GRM1885C1H561JA01D&x=9&y=9&search=startwith, CompType=Capacitor, LatestRevisionDate=2017-03-09, MountType=SMT, PackageReference=0603, PartNumber=GRM1885C1H561JA01D, Polarized=N, Published=2008-06-19, Publisher="Texas Instruments", RoHS=Y, SizeArea_mm2=1.28, SizeAreaWB_mm2=4.68, SizeX_mm=1.6, SizeY_mm=0.8, SizeZ_mm=1, Supplier 1=Digi-Key, Supplier 2=Mouser, Supplier 3=Farnell, Supplier Part Number 2=81-GRM39C561J50, Supplier Part Number 3=1828912, TaMax_C=125°C, TaMin_C=-55°C, Technology=Ceramic, U/M=EA, VDC_V=50V
C100: library part CMP-0006897-4, "CAP, CERM, 2200 pF, 50 V, +/- 10%, X7R, 0603", Cap_Case=0603, Manufacturer=Kemet, Supplier Part Number 1=1362428, TempCo=X7R, Tolerance_%=10%, Value1=Unknown, Value2=50V, ValueDisplayed=2200pF, AEC Category=Q200, AEC Qualified=?, Cap_F=2.2nF, ComponentLink1Description="Datasheet link", ComponentLink1URL=http://www.kemet.com/kemet/web/homepage/kechome.nsf/vapubfiles/F3102_Y5V.pdf/$file/F3102_Y5V.pdf, CompType=Capacitor, LatestRevisionDate=2017-03-09, MountType=SMT, PackageReference=0603, PartNumber=C0603C222K5RAC, Polarized=N, Published=2008-06-19, Publisher="Texas Instruments", RoHS=Y, SizeArea_mm2=1.28, SizeAreaWB_mm2=4.68, SizeX_mm=1.6, SizeY_mm=0.8, SizeZ_mm=1, Supplier 1=Farnell, TaMax_C=125°C, TaMin_C=-55°C, Technology=Ceramic, U/M=EA, VDC_V=50V
C104: library part CMP-0007471-5, "CAP, CERM, 1200 pF, 100 V, +/- 10%, X7R, 0603", Cap_Case=0603, Manufacturer=MuRata, Supplier Part Number 1=490-1474-1-ND, TempCo=X7R, Tolerance_%=10%, Value1=Unknown, Value2=100V, ValueDisplayed=1200pF, AEC Category=Q200, AEC Qualified=?, Cap_F=1.2nF, ComponentLink1Description="Datasheet link", ComponentLink1URL=http://search.murata.co.jp/Ceramy/PnsearchViewAction.do?HnOFG=ON&HnNFG=ON&SEL_CNT=50&sLang=en&sKey=GRM188R72A122KA01D&x=9&y=9&search=startwith, CompType=Capacitor, LatestRevisionDate=2017-03-09, MountType=SMT, PackageReference=0603, PartNumber=GRM188R72A122KA01D, Polarized=N, Published=2008-06-19, Publisher="Texas Instruments", RoHS=Y, SizeArea_mm2=1.28, SizeAreaWB_mm2=4.68, SizeX_mm=1.6, SizeY_mm=0.8, SizeZ_mm=1, Supplier 1=Digi-Key, Supplier 2=Mouser, Supplier Part Number 2=81-GRM18R72A122KA01D, TaMax_C=125°C, TaMin_C=-55°C, Technology=Ceramic, U/M=EA, VDC_V=100V
C105: library part CMP-0007275-4, "CAP, CERM, 56 pF, 100 V, +/- 5%, C0G/NP0, 0603", Cap_Case=0603, Manufacturer=MuRata, Supplier Part Number 1=490-1345-1-ND, TempCo=C0G/NP0, Tolerance_%=5%, Value1=Unknown, Value2=100V, ValueDisplayed=56pF, AEC Category=Q200, AEC Qualified=?, Cap_F=56pF, ComponentLink1Description="Datasheet link", ComponentLink1URL=http://search.murata.co.jp/Ceramy/PnsearchViewAction.do?HnOFG=ON&HnNFG=ON&SEL_CNT=50&sLang=en&sKey=GRM1885C2A560JA01D&x=9&y=9&search=startwith, CompType=Capacitor, LatestRevisionDate=2017-03-09, MountType=SMT, PackageReference=0603, PartNumber=GRM1885C2A560JA01D, Polarized=N, Published=2008-06-19, Publisher="Texas Instruments", RoHS=Y, SizeArea_mm2=1.28, SizeAreaWB_mm2=4.68, SizeX_mm=1.6, SizeY_mm=0.8, SizeZ_mm=1, Supplier 1=Digi-Key, Supplier 2=Mouser, Supplier Part Number 2=81-GRM185C2A560JA01D, TaMax_C=125°C, TaMin_C=-55°C, Technology=Ceramic, U/M=EA, VDC_V=100V
C106 C107 C108 C109 C112 C113 C114 C115 C116 C117 C118 C119: library part CMP-0007173-4, "CAP, CERM, 1000 pF, 50 V, +/- 5%, C0G/NP0, 0603", Cap_Case=0603, Manufacturer=MuRata, Supplier Part Number 1=490-1451-1-ND, TempCo=C0G/NP0, Tolerance_%=5%, Value1=Unknown, Value2=50V, ValueDisplayed=1nF, AEC Category=Q200, AEC Qualified=?, Cap_F=1nF, ComponentLink1Description="Datasheet link", ComponentLink1URL=http://search.murata.co.jp/Ceramy/PnsearchViewAction.do?HnOFG=ON&HnNFG=ON&SEL_CNT=50&sLang=en&sKey=GRM1885C1H102JA01D&x=9&y=9&search=startwith, CompType=Capacitor, LatestRevisionDate=2017-03-09, MountType=SMT, PackageReference=0603, PartNumber=GRM1885C1H102JA01D, Polarized=N, Published=2008-06-19, Publisher="Texas Instruments", RoHS=Y, SizeArea_mm2=1.28, SizeAreaWB_mm2=4.68, SizeX_mm=1.6, SizeY_mm=0.8, SizeZ_mm=1, Supplier 1=Digi-Key, Supplier 2=Mouser, Supplier 3=Farnell, Supplier Part Number 2=81-GRM39C102J50, Supplier Part Number 3=8819920, TaMax_C=125°C, TaMin_C=-55°C, Technology=Ceramic, U/M=EA, VDC_V=50V
C128 C129 C130 C131: library part CMP-0009613-2, "CAP, CERM, 2200 pF, 300 V, +/- 20%, E, TH, 2- Leads, Body 9x7mm, Pin Spacing 7.5mm", Cap_Case=9x7x9mm, Manufacturer=MuRata, Supplier Part Number 1=DE6E3KJ222MN3A-ND, TempCo=E, Tolerance_%=20%, Value1=Unknown, Value2=300V, ValueDisplayed=2200pF, AEC Category=Q200, AEC Qualified=?, Cap_F=2.2nF, ComponentLink1Description="Datasheet link", ComponentLink1URL=http://psearch.murata.com/capacitor/product/DE6E3KJ222MN3A.pdf, CompType=Capacitor, LatestRevisionDate=2017-03-09, MountType=TH, PackageReference="TH, 2- Leads, Body 9x7mm, Pin Spacing 7.5mm", PartNumber=DE6E3KJ222MN3A, Polarized=N, Published=2008-06-19, Publisher="Texas Instruments", RoHS=Y, SizeArea_mm2=63, SizeAreaWB_mm2=99, SizeX_mm=9, SizeY_mm=7, SizeZ_mm=12, Supplier 1=Digi-Key, Supplier 2=Mouser, Supplier Part Number 2=81-DE6E3KJ222MN3A, TaMax_C=125°C, TaMin_C=-40°C, Technology=Ceramic, U/M=EA, VDC_V=300V
C132: library part CMP-0118136-1, "WCAP-FTX2 Film Capacitor, THT, L18 x W8.5 x H14.5mm, 330nF, 275V", Capacitance Tolerance=+/-10%, Insulation Resistance=30000MOhm, Manufacturer="Wurth Elektronik", Operating Temperature Max=105°C, Operating Temperature Min=-40°C, Rate of Voltage Rise=260V/us, Rated Voltage (AC)=275V, Cap_F=330nF, Category="Film Capacitors", Component Type=Standard, ComponentLink1Description="Website Link", ComponentLink1URL=https://www.we-online.com/redexpert/article/890324025034CS?ad, ComponentLink2Description="Datasheet Link", ComponentLink2URL=https://www.we-online.com/redexpert/spec/890324025034CS?ad, Design Item ID=890324025034CS, Dissipation Factor @1kHz=0.1%, Dissipation Factor @10kHz=0.2%, Dissipation Factor @100kHz=2%, Height=14.5mm, Length=18mm, Manufacturer Part Number=890324025034CS, Match Code=WCAP-FTX2, Mount="Through Hole", Packaging=Carton, PartNumber=890324025034CS, Pin Count=2, Pitch=15mm, Source="Film Capacitors.SchLib", Technical Reference=MX2P015334K275ACPP46004, Width=8.5mm
D4: library part CMP-0002943-3, "LED, Green, SMD", Color=Green, Manufacturer=Kingbright, Value1=W, Value2=2.1V, Angle=120, ComponentLink1Description="Datasheet link", ComponentLink1URL=http://www.kingbrightusa.com/images/catalog/SPEC/APT1608MGC.pdf, CompType=LED, Io_A=20mA, Ir_A=10µA, MountType=SMT, PackageReference=0603(1608), PartNumber=APT1608MGC, RoHS=Y, TJmax_C=85°C, Type=?, Vf_V=2.1V, Vr_V=5V
D5 S1D2 S2D2: library part CMP-0002944-3, "LED, Yellow, SMD", Color=yellow, Manufacturer=Kingbright, Value1=W, Value2=2.5V, Angle=120, ComponentLink1Description="Datasheet link", ComponentLink1URL=http://www.kingbrightusa.com/images/catalog/SPEC/APT1608SYCK.pdf, CompType=LED, Io_A=20mA, Ir_A=10µA, MountType=SMT, PackageReference=0603(1608), PartNumber=APT1608SYCK, RoHS=Y, TJmax_C=85°C, Type=?, Vf_V=2.5V, Vr_V=5V
D6 D7 D8 D9 D11 D12: library part CMP-0028627-2, "Diode, Schottky, 30 V, 0.2 A, SOT-323", Manufacturer="Micro Commercial Components", Value1=0.2A, Value2=1V, AEC Category=Q101, AEC Qualified=?, ComponentLink1Description="Datasheet link", ComponentLink1URL=http://www.mccsemi.com/up_pdf/BAT54WT~BAT54SWT(SOT-323).pdf, CompType=Diode, Green_EU RoHS=Incomplete, Green_EU RoHS-2=Incomplete, Green_Lifecycle="Not Set", Green_REACh=Incomplete, Io_A=200mA, MountType=SMT, PackageReference=SOT-323, PartNumber=BAT54AWT-TP, RoHS=Y, SizeArea_mm2=4.84, SizeAreaWB_mm2=10.24, SizeX_mm=2.2, SizeY_mm=2.2, SizeZ_mm=1.1, TJmax_C=125°C, Type=Schottky, Vf_V=1V, Vr_V=30V
D10 S1D3 S2D3: library part CMP-0091305-2, "Red 630nm LED Indication - Discrete 2V 0603 (1608 Metric)", Color=Red, Digikey Part Number=754-1359-1-ND, Forward Current=20mA, Manufacturer=Kingbright, Mouser Part Number=604-APG1608SURKC/T, Operating Temperature Range="-40°C to +85°C", Power_TotalModule=75mW, AEC Qualified=No, Angle=120°, Ciiva Ids=1546259, ComponentLink1Description=Datasheet, ComponentLink1URL=https://www.kingbrightusa.com/images/catalog/SPEC/APG1608SURKC-T.pdf, datasheet=https://www.kingbrightusa.com/images/catalog/SPEC/APG1608SURKC-T.pdf, Datasheet Path=datasheets/Diode-APG1608SURKC_T.pdf, Digikey Description="LED RED CLEAR CHIP SMD", helpURL=https://upverter.com/upn/revision/2eb98c3e10735b4d/, Import Ts=1521847491, LambdaD=630nm, LambdaP=645nm, Lead Free=Yes, Led Orientation="Top View", Luminous Intensity=110mcd, Mouser Description="APG1608SURKC/T Red LED, 630 nm 1608 (0603) Clear, Rectangle Lens SMD package", PackageReference=0603, Part Number=APG1608SURKC/T, PartNumber=APG1608SURKC/T, Release Date=1390185805, RoHS=TRUE, SizeZ_mm=0.28mm, TJmax_C=115°C, Vault Guid=951D1CBD-CFDD-403F-A235-A7AC0CBD640F, Vf_V=2V, Vr_V=5V
F1 F2: library part CMP-0123009-1, "6.3 A 300 V AC DC Fuse Board Mount (Cartridge Style Excluded) Through Hole Radial, Box", Digikey Part Number=F5465CT-ND, Fuse Current=6.3A, Fuse Voltage Drop=65mV, Manufacturer="Littelfuse Inc", Mouser Part Number=576-36916300000, Operating Temperature Range="-40°C to +85°C", AEC Qualified=No, ComponentLink1Description=Datasheet, ComponentLink1URL=https://www.littelfuse.com/media?resourcetype=datasheets&itemid=2d4d6025-892d-4199-9612-78de96bc2dfe&filename=littelfuse-fuse-369-datasheet, datasheet=https://www.littelfuse.com/media?resourcetype=datasheets&itemid=2d4d6025-892d-4199-9612-78de96bc2dfe&filename=littelfuse-fuse-369-datasheet, Datasheet Date=2023-06-01, Datasheet Path=datasheets/Fuse-36916300000.pdf, Datasheet Version=GD, Digikey Description="FUSE BOARD MNT 6.3A 300VAC RAD", Fuse I2T=160.74A2Sec, Fuse Speed=Slow, helpURL=https://upverter.com/upn/revision/4938207360b7b692/, Interrupt_AC=50A, Lead Free=Yes, MeltingTyp=160.74A2Sec, Mouser Description="Fuses with Leads (Through Hole) 300V TL TE5 LL 6.3A", PackageReference=RADIAL, Part Number=36916300000, PartNumber=36916300000, Res_ohm=0.0077Ω, RoHS=TRUE, SizeZ_mm=8mm, Standoff Height=0.5mm, Supplier 1=Digikey, Supplier 2=Mouser, Supplier Part Number 1=F5465CT-ND, Supplier Part Number 2=576-36916300000, VAC_V=300V, VDC_V=300V
FID1 FID2 FID3: library part CMP-0077181-1, "Fiducial mark.  There is nothing to buy or mount.", Manufacturer=N/A, ClassName=FiducialMark, CompType=Fiducial, MountType=N/A, PackageReference=N/A, PartNumber=N/A
H1 H2 H3 H4: library part CMP-0003617-1, "Machine Screw, Round, #4-40 x 1/4, Nylon, Philips panhead", Manufacturer="B&F Fastener Supply", Supplier Part Number 1=H542-ND, ClassName="Mounting Holes", ComponentLink1Description="Datasheet Link", ComponentLink1URL=http://www.fasnetdirect.com/refguide/Nylpanms.pdf, CompType=Hardware, Key="NY PMS 440 0025 PH", LatestRevisionDate=2017-03-09, MountType=N/A, PackageReference=Screw, PartNumber="NY PMS 440 0025 PH", Publisher="Texas Instruments", RoHS=Y, Supplier 1=Digi-Key
H5 H6 H7 H8: library part CMP-0003610-1, "Standoff, Hex, 0.5\"L #4-40 Nylon", Manufacturer=Keystone, Supplier Part Number 1=36-1902C-ND, ComponentLink1Description="Datasheet Link", ComponentLink1URL=http://www.keyelco.com/pdfs/M55-prod31.pdf, CompType=Hardware, Key=1902C, LatestRevisionDate=2017-03-09, MountType=N/A, PackageReference=Standoff, PartNumber=1902C, Publisher="Texas Instruments", RoHS=Y, Supplier 1=Digi-Key
J1: library part CMP-0055799-1, "Panel Socket, 24A, R/A, Gold, TH", Color=Red, Current_A=24A, Manufacturer="Cliff Electronic Components", Supplier Part Number 1=20T2058, Voltage_V=1kV, CNHeader=FALSE, ComponentLink1Description="Datasheet URL", ComponentLink1URL=http://www.cliffuk.co.uk/products/testleads/sockets/S16NPC.pdf, CompType=Socket, ContactFinish=Gold, CT=FALSE, Gender=Female, LatestRevisionDate=26/05/2017, MountType=TH, Orientation=R/A, PackageReference="Panel Socket, R/A, TH", PartNumber=FCR7350R, PinCount=5, Publisher="Texas Instruments", RoHS=Y, Supplier 1=Newark, Supplier 2=Farnell, Supplier Part Number 2=1854508
J2: library part CMP-0098295-2, "Banana Test Connector, 4mm, Socket, PCB Mount, 24 A, 1 kV, Gold Plated Contacts, Blue", Current_A=24A, Manufacturer="CLIFF Electronic Components", Operating Temperature Range="-40°C to +80°C", Voltage_V=1kV, AEC Qualified=No, ComponentLink1Description=Datasheet, ComponentLink1URL=https://www.cliffuk.co.uk/products/testleads/sockets/fcr7350.pdf, Conn Orientation="Right Angle", ContactFinish=Gold, datasheet=https://www.cliffuk.co.uk/products/testleads/sockets/fcr7350.pdf, Datasheet Path=datasheets/Conn-FCR7350L.pdf, helpURL=https://upverter.com/upn/revision/8f9f2a5472dd5be9/, Lead Free=Yes, PackageReference=CONN_BANANA_JACK, Part Number=FCR7350L, PartNumber=FCR7350L, PinCount=1, RoHS=TRUE, SizeZ_mm=11.6mm, Standoff Height=0.7mm
J3 J4: library part CMP-0055798-1, "Panel Socket, 24A, R/A, Gold, TH", Color=Black, Current_A=24A, Manufacturer="Cliff Electronic Components", Supplier Part Number 1=20T2055, Voltage_V=1kV, CNHeader=FALSE, ComponentLink1Description="Datasheet URL", ComponentLink1URL=http://www.cliffuk.co.uk/products/testleads/sockets/S16NPC.pdf, CompType=Socket, ContactFinish=Gold, CT=FALSE, Gender=Female, LatestRevisionDate=26/05/2017, MountType=TH, Orientation=R/A, PackageReference="Panel Socket, R/A, TH", PartNumber=FCR7350B, PinCount=5, Publisher="Texas Instruments", RoHS=Y, Supplier 1=Newark, Supplier 2=Farnell, Supplier Part Number 2=1854507